# EAGLE board CC1101-1190EM_Adapter_V3.00 (EAGLE 7.1.0)

No outline drawn. Coordinates in mm, seen from the top.
Copper layers (1*16): Top 0.0356mm / dielectric 1.5011mm / Bottom 0.0356mm
Design rules "LaenPCBOrder": minimum track width 6mil, minimum drill 13mil, track to track 6mil, track to pad 6mil, pad to pad 6mil, via to via 6mil, smd to smd 6mil, copper to edge 15mil, drill to drill 6mil, minimum pad ring 7mil, minimum via ring 7mil, stop-mask expansion 4mil, vias tented up to drill 0mil, thermal gap 10mil

## Footprints (pad centres in the part's own frame; a part is rotated, then mirrored left to right if it is on the bottom)
C1206 = smd 1.6 x 1.8: 1 -1.4,0; 2 1.4,0
C0805 = smd 1.3 x 1.5: 1 -0.95,0; 2 0.95,0
PINHDR10X2_50X50MIL_SMT = smd 2.413 x 0.762: P$1 -1.968,5.715; P$2 1.968,5.715; P$3 -1.968,4.445; P$4 1.968,4.445; P$5 -1.968,3.175; P$6 1.968,3.175; P$7 -1.968,1.905; P$8 1.968,1.905; P$9 -1.968,0.635; P$10 1.968,0.635; P$11 -1.968,-0.635; P$12 1.968,-0.635; P$13 -1.968,-1.905; P$14 1.968,-1.905; P$15 -1.968,-3.175; P$16 1.968,-3.175; P$17 -1.968,-4.445; P$18 1.968,-4.445; P$19 -1.968,-5.715; P$20 1.968,-5.715
TO223 = smd 1.219 x 2.235: 1 -2.311,-3.099; 2 0,-3.099; 3 2.311,-3.099 | smd 3.6 x 2.2: 4 0,3.099
ARDUINOMINI = drill 1.1: P$1 -7.62,-13.97; P$2 -7.62,-11.43; P$3 -7.62,-8.89; P$4 -7.62,-6.35; P$5 -7.62,-3.81; P$6 -7.62,-1.27; P$7 -7.62,3.81; P$8 -7.62,1.27; P$9 -7.62,6.35; P$10 -7.62,8.89; P$11 -7.62,11.43; P$12 -7.62,13.97; P$13 -6.35,16.51; P$14 -3.81,16.51; P$15 -1.27,16.51; P$16 1.27,16.51; P$17 3.81,16.51; P$18 6.35,16.51; P$19 7.62,13.97; P$20 7.62,11.43; P$21 7.62,8.89; P$22 7.62,6.35; P$23 7.62,3.81; P$24 7.62,1.27; P$25 7.62,-1.27; P$26 7.62,-3.81; P$27 7.62,-6.35; P$28 7.62,-8.89; P$29 7.62,-11.43; P$30 7.62,-13.97; P$34 5.08,5.08; P$35 5.08,2.54
VIA_NO_THERMAL = drill 0.6: 1 0,0

## Placement (x,y rotation side)
C1  22uF  [C1206]  21.16,14.2 90 bottom
C2  10uF  [C1206]  26.14,6.96 0 bottom
C3  33pF  [C0805]  0.03,-1.7 0 top
C4  33pF  [C0805]  0.03,-7.72 0 top
C13  33pF  [C0805]  28.32,32.26 180 bottom
C14  33pF  [C0805]  20.42,22.5 180 bottom
C15  33pF  [C0805]  2.54,16.76 180 bottom
C16  33pF  [C0805]  5.46,37.34 0 bottom
C17  33pF  [C0805]  1.32,37.34 0 bottom
C18  33pF  [C0805]  1.55,31.24 270 bottom
C19  33pF  [C0805]  6.65,31.04 0 bottom
J1  20021121-00010T4LF  [PINHDR10X2_50X50MIL_SMT]  12.19,41.78 270 top
J2  20021121-00010T4LF  [PINHDR10X2_50X50MIL_SMT]  12.19,11.3 270 top
U2  RT9164A  [TO223]  28.19,13.08 90 bottom
U$1  ARDUINOMINI  [ARDUINOMINI]  16.31,25.63 90 bottom
VIA89  GND_VIA_NO_THERMAL  [VIA_NO_THERMAL]  1.14,2.31 0 top

## Library data of the parts
C1-C4 C13-C19 = eagle-ltspice; SPICEMODEL: NONE; SPICEPREFIX: C
J1 J2 U2 = fhpower
U$1 = fhdevices
VIA89 = fhmechanical

## Nets
CS: C19.1 J1.P$14 U$1.P$30
GDO0: C14.1 J1.P$10 U$1.P$5 U$1.P$8
GDO2: J1.P$12 U$1.P$1
GND: C1.2 C2.2 C3.2 C4.2 C13.2 C14.2 C15.2 C16.2 C17.2 C18.2 C19.2 J1.P$1 J1.P$19 J2.P$2 U2.1 U$1.P$9 U$1.P$20
LNA_EN: C4.1 J1.P$7 U$1.P$2
PA_EN: C3.1 C15.1 J1.P$3 U$1.P$3
SCLK: C18.1 J1.P$16 U$1.P$27
SI: C16.1 J1.P$18 U$1.P$29
SO: C17.1 J1.P$20 U$1.P$28
VIN: C2.1 C13.1 U2.3 U$1.P$19
VOUT: C1.1 J2.P$7 J2.P$9 U2.2 U2.4

## Tracks (layer width: path | path; a pad name or v marks a point on that pad's centre or on a via)
CS  (2 unrouted)
GDO0  (3 unrouted)
GDO2  (1 unrouted)
GND  (16 unrouted)
LNA_EN  (2 unrouted)
PA_EN  (3 unrouted)
SCLK  (2 unrouted)
SI  (2 unrouted)
SO  (2 unrouted)
VIN  (3 unrouted)
VOUT  (4 unrouted)